# Altium PCB N303-3V1.0.pcbdoc (part 3 of 3)
Units mm, origin at the board's own origin, x right, y up, seen from the top; angles counter-clockwise.
Board outline 100 x 100 mm, 2 copper layers (Top Layer, Bottom Layer); 92 components, 15 nets, 360 pads, 304 vias.
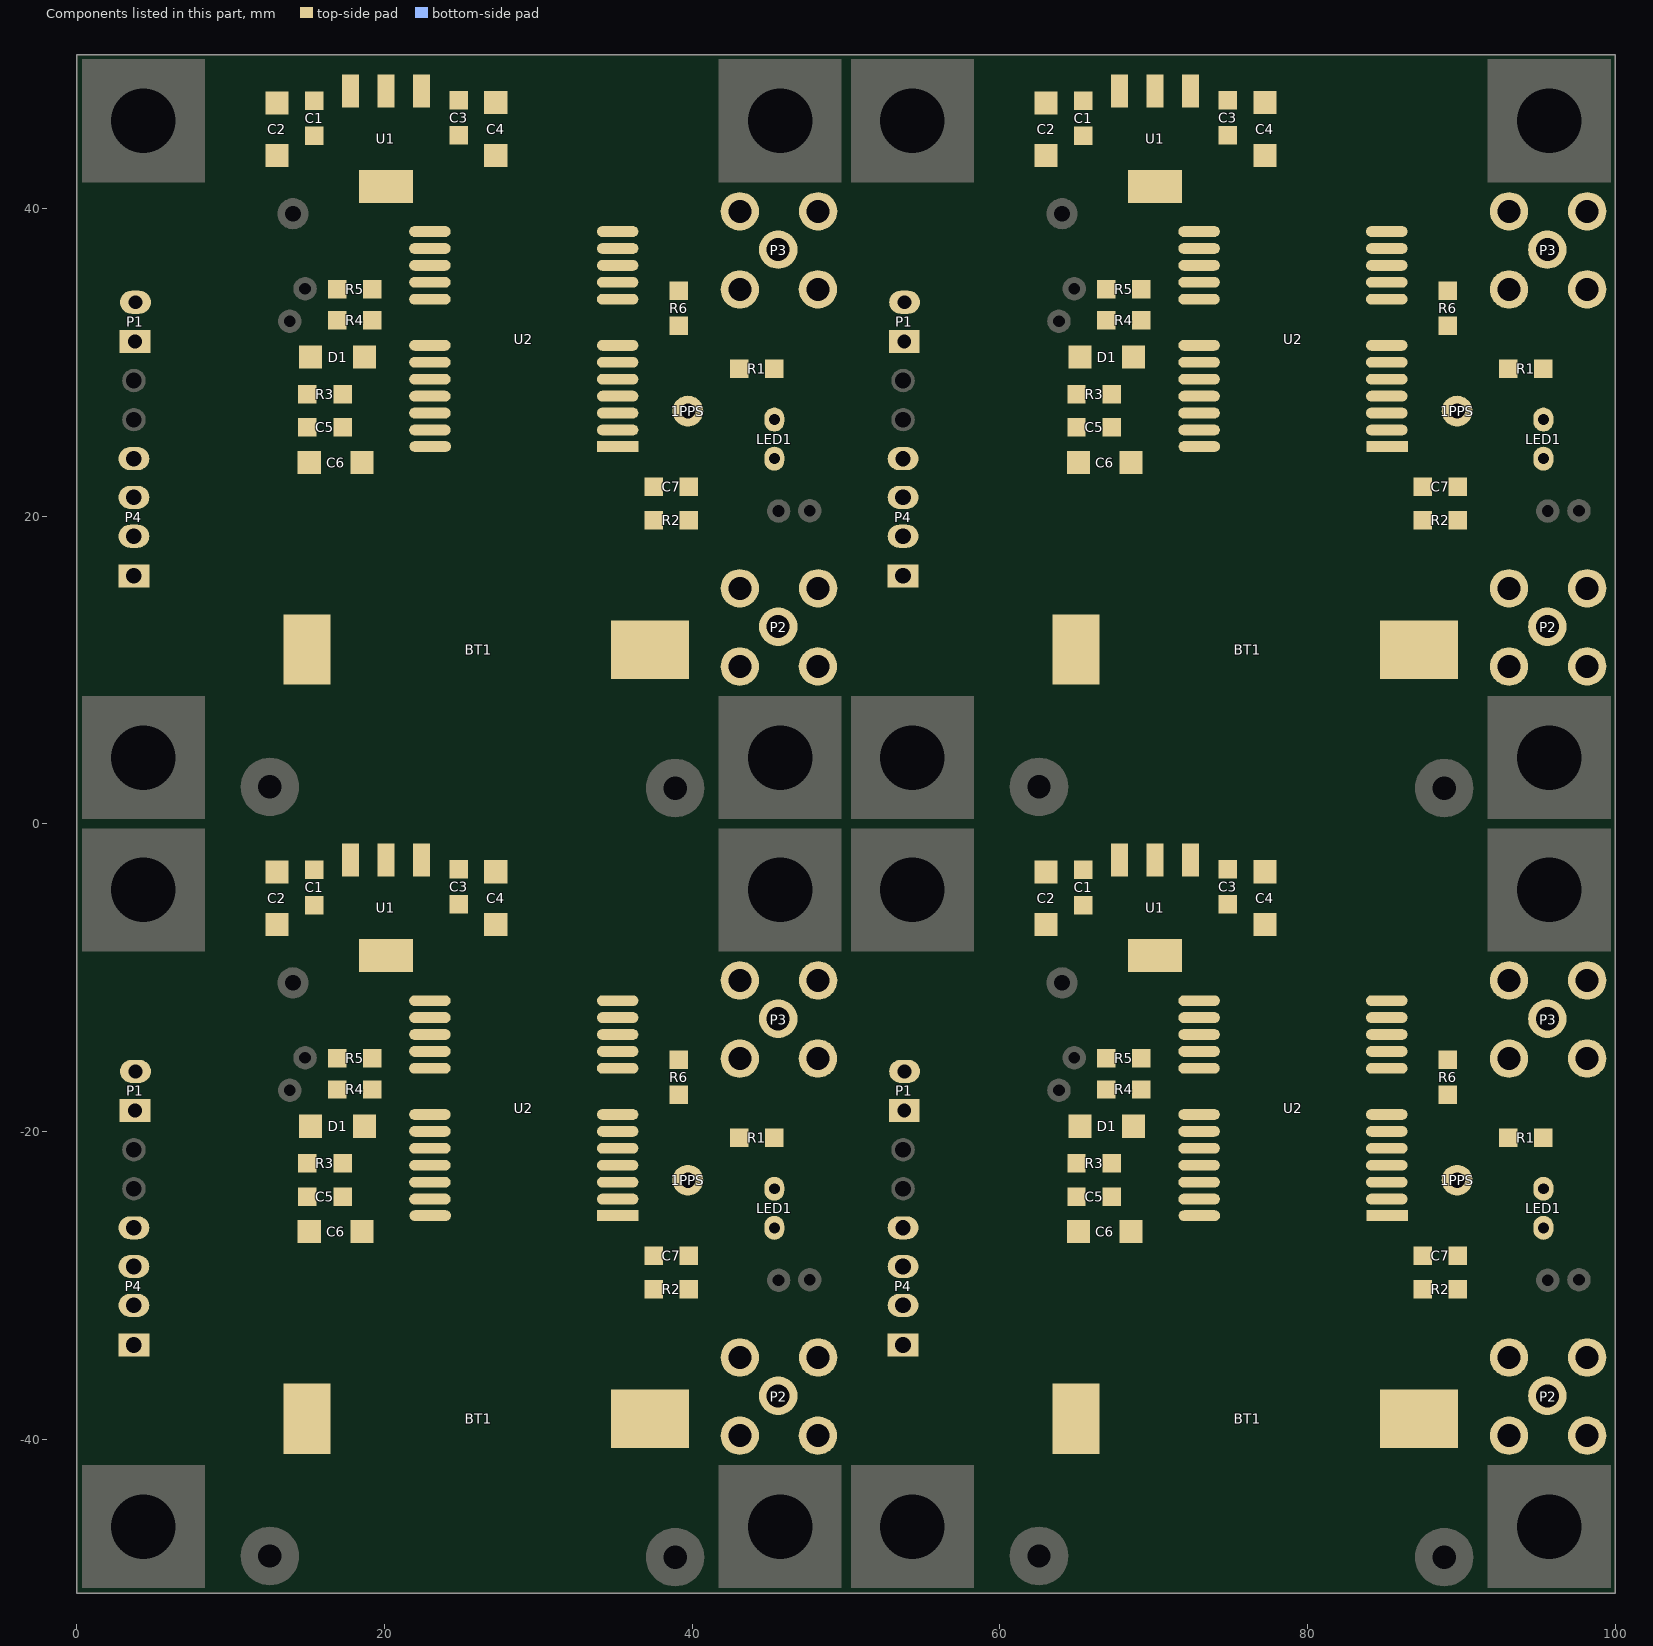
[diagram p3: the components of this part, seen from the top]

## Other copper
Top Layer:
  rectangle: 66.713,-9.69 73.495,-5.906
  rectangle: 62.522,-16.167 65.748,-14.161
  rectangle: 62.802,-18.199 65.773,-16.497
  rectangle: 87.287,-11.722 91.478,-10.452
  rectangle: 94.809,-16.828 96.406,-14.364
  rectangle: 97.371,-13.627 99.352,-11.671
  rectangle: 94.704,-10.833 96.533,-8.75
  rectangle: 75.273,-29.324 82.944,-11.459
  rectangle: 50.66,-35.522 52.108,-9.081
  rectangle: 94.78,-30.848 96.457,-28.41
  rectangle: 66.713,40.31 73.495,44.094
  rectangle: 62.522,33.833 65.748,35.839
  rectangle: 62.802,31.801 65.773,33.503
  rectangle: 87.287,38.278 91.478,39.548
  rectangle: 94.809,33.172 96.406,35.636
  rectangle: 97.371,36.373 99.352,38.329
  rectangle: 94.704,39.167 96.533,41.25
  rectangle: 75.273,20.676 82.944,38.541
  rectangle: 50.66,14.478 52.108,40.919
  rectangle: 94.78,19.152 96.457,21.59
  rectangle: 16.713,-9.69 23.495,-5.906
  rectangle: 12.522,-16.167 15.748,-14.161
  rectangle: 12.802,-18.199 15.773,-16.497
  rectangle: 37.287,-11.722 41.478,-10.452
  rectangle: 44.809,-16.828 46.406,-14.364
  rectangle: 47.371,-13.627 49.352,-11.671
  rectangle: 44.704,-10.833 46.533,-8.75
  rectangle: 25.273,-29.324 32.944,-11.459
  rectangle: 0.66,-35.522 2.108,-9.081
  rectangle: 44.78,-30.848 46.457,-28.41
  rectangle net GPS_1PPS: 44.78,19.152 46.457,21.59
  rectangle net GND: 0.66,14.478 2.108,40.919
  rectangle net GND: 25.273,20.676 32.944,38.541
  rectangle net GND: 44.704,39.167 46.533,41.25
  rectangle net GND: 47.371,36.373 49.352,38.329
  rectangle net GND: 44.809,33.172 46.406,35.636
  rectangle net GND: 37.287,38.278 41.478,39.548
  rectangle net GPS_RX: 12.802,31.801 15.773,33.503
  rectangle net GPS_TX: 12.522,33.833 15.748,35.839
  rectangle net 3.3V: 16.713,40.31 23.495,44.094
  region: 68.161,-22.06 70.066,-22.06 71.29,-23.284 69.385,-23.284
  region: 62.573,-7.811 66.078,-7.811 66.104,-7.785 66.104,-9.843 66.628,-10.367 71.167,-10.367 71.167,-11.484 69.177,-13.475 62.827,-13.475 62.344,-12.992
  region: 74.257,-8.065 78.829,-8.065 78.981,-8.217 78.981,-9.055 77.737,-10.3 73.876,-10.3
  region: 78.981,-0.699 90.284,-0.699 90.386,-0.597 90.869,-1.08 90.869,-9.462 91.579,-10.172 83.351,-10.172 82.766,-10.757 82.766,-11.484 75.527,-11.484 75.527,-10.325 75.502,-10.3 76.721,-9.081 78.956,-9.081
  region: 90.183,-13.684 91.123,-13.684 91.25,-13.811 91.25,-16.548 91.783,-17.082 99.378,-17.082 99.378,-18.91 99.225,-19.063 90.843,-19.063 90.843,-18.936 90.411,-18.504 90.462,-18.453 90.462,-14.11 90.005,-13.653
  region: 96.38,-18.834 96.456,-18.91 99.378,-18.91 99.378,-32.855 99.454,-32.931 99.428,-32.957 98.183,-32.957 96.711,-31.484 96.711,-19.418 96.634,-19.418 96.152,-18.936
  region: 87.313,-24.143 88.405,-24.143 89.065,-24.803 90.538,-24.803 91.224,-24.117 91.935,-24.117 93.993,-26.175 93.993,-26.861 94.221,-27.75 94.221,-32.626 91.15,-33.031 91.097,-33.084 90.894,-32.88 90.894,-32.449 92.596,-30.747 92.596,-25.845 92.113,-25.362 91.119,-25.362 91.119,-25.391 90.538,-25.972 90.538,-27.165 89.751,-27.165 87.313,-24.727
  region: 71.92,-28.766 75.629,-32.474 71.819,-32.474
  region: 71.819,-32.474 90.716,-32.474 90.818,-32.576 90.818,-35.878 84.29,-35.878 84.366,-35.954 84.366,-41.313 90.691,-41.313 90.792,-41.212 91.183,-41.602 91.183,-49.317 62.646,-49.317 62.471,-49.492 62.471,-41.034 63.183,-41.745 67.094,-41.745 67.094,-41.669 67.856,-40.907 67.856,-37.3 71.793,-33.363
  region: 50.584,-35.37 50.61,-35.344 61.938,-35.344 62.649,-36.055 62.649,-49.314 62.573,-49.39 59.804,-49.39 59.246,-48.832 59.246,-41.339 58.712,-40.805 50.597,-40.805
  region: 62.065,-0.597 59.804,-0.597 59.144,-1.257 59.144,-8.573 58.458,-9.258 51.702,-9.258 51.651,-9.208 51.524,-9.335 51.524,-14.872 58.611,-14.872 59.906,-13.576 59.906,-2.756
  region: 55.563,-20.815 56.071,-20.307 57.645,-20.307 58.331,-19.622 58.382,-19.672 58.382,-25.514 57.518,-26.378 55.588,-26.378
  region: 68.161,27.94 70.066,27.94 71.29,26.716 69.385,26.716
  region: 62.573,42.189 66.078,42.189 66.104,42.215 66.104,40.157 66.628,39.633 71.167,39.633 71.167,38.516 69.177,36.525 62.827,36.525 62.344,37.008
  region: 74.257,41.935 78.829,41.935 78.981,41.783 78.981,40.945 77.737,39.7 73.876,39.7
  region: 78.981,49.301 90.284,49.301 90.386,49.403 90.869,48.92 90.869,40.538 91.579,39.828 83.351,39.828 82.766,39.243 82.766,38.516 75.527,38.516 75.527,39.675 75.502,39.7 76.721,40.919 78.956,40.919
  region: 90.183,36.316 91.123,36.316 91.25,36.189 91.25,33.452 91.783,32.918 99.378,32.918 99.378,31.09 99.225,30.937 90.843,30.937 90.843,31.064 90.411,31.496 90.462,31.547 90.462,35.89 90.005,36.347
  region: 96.38,31.166 96.456,31.09 99.378,31.09 99.378,17.145 99.454,17.069 99.428,17.043 98.183,17.043 96.711,18.516 96.711,30.582 96.634,30.582 96.152,31.064
  region: 87.313,25.857 88.405,25.857 89.065,25.197 90.538,25.197 91.224,25.883 91.935,25.883 93.993,23.825 93.993,23.139 94.221,22.25 94.221,17.374 91.15,16.969 91.097,16.916 90.894,17.12 90.894,17.551 92.596,19.253 92.596,24.155 92.113,24.638 91.119,24.638 91.119,24.609 90.538,24.028 90.538,22.835 89.751,22.835 87.313,25.273
  region: 71.92,21.234 75.629,17.526 71.819,17.526
  region: 71.819,17.526 90.716,17.526 90.818,17.424 90.818,14.122 84.29,14.122 84.366,14.046 84.366,8.687 90.691,8.687 90.792,8.788 91.183,8.398 91.183,0.683 62.646,0.683 62.471,0.508 62.471,8.966 63.183,8.255 67.094,8.255 67.094,8.331 67.856,9.093 67.856,12.7 71.793,16.637
  region: 50.584,14.63 50.61,14.656 61.938,14.656 62.649,13.945 62.649,0.686 62.573,0.61 59.804,0.61 59.246,1.168 59.246,8.661 58.712,9.195 50.597,9.195
  region: 62.065,49.403 59.804,49.403 59.144,48.743 59.144,41.427 58.458,40.742 51.702,40.742 51.651,40.792 51.524,40.665 51.524,35.128 58.611,35.128 59.906,36.424 59.906,47.244
  region: 55.563,29.185 56.071,29.693 57.645,29.693 58.331,30.378 58.382,30.328 58.382,24.486 57.518,23.622 55.588,23.622
  region: 18.161,-22.06 20.066,-22.06 21.29,-23.284 19.385,-23.284
  region: 12.573,-7.811 16.078,-7.811 16.104,-7.785 16.104,-9.843 16.628,-10.367 21.167,-10.367 21.167,-11.484 19.177,-13.475 12.827,-13.475 12.344,-12.992
  region: 24.257,-8.065 28.829,-8.065 28.981,-8.217 28.981,-9.055 27.737,-10.3 23.876,-10.3
  region: 28.981,-0.699 40.284,-0.699 40.386,-0.597 40.869,-1.08 40.869,-9.462 41.579,-10.172 33.351,-10.172 32.766,-10.757 32.766,-11.484 25.527,-11.484 25.527,-10.325 25.502,-10.3 26.721,-9.081 28.956,-9.081
  region: 40.183,-13.684 41.123,-13.684 41.25,-13.811 41.25,-16.548 41.783,-17.082 49.378,-17.082 49.378,-18.91 49.225,-19.063 40.843,-19.063 40.843,-18.936 40.411,-18.504 40.462,-18.453 40.462,-14.11 40.005,-13.653
  region: 46.38,-18.834 46.457,-18.91 49.378,-18.91 49.378,-32.855 49.454,-32.931 49.428,-32.957 48.183,-32.957 46.711,-31.484 46.711,-19.418 46.634,-19.418 46.152,-18.936
  region: 37.313,-24.143 38.405,-24.143 39.065,-24.803 40.538,-24.803 41.224,-24.117 41.935,-24.117 43.993,-26.175 43.993,-26.861 44.221,-27.75 44.221,-32.626 41.15,-33.031 41.097,-33.084 40.894,-32.88 40.894,-32.449 42.596,-30.747 42.596,-25.845 42.113,-25.362 41.119,-25.362 41.119,-25.391 40.538,-25.972 40.538,-27.165 39.751,-27.165 37.313,-24.727
  region: 21.92,-28.766 25.629,-32.474 21.819,-32.474
  region: 21.819,-32.474 40.716,-32.474 40.818,-32.576 40.818,-35.878 34.29,-35.878 34.366,-35.954 34.366,-41.313 40.691,-41.313 40.792,-41.212 41.183,-41.602 41.183,-49.317 12.646,-49.317 12.471,-49.492 12.471,-41.034 13.183,-41.745 17.094,-41.745 17.094,-41.669 17.856,-40.907 17.856,-37.3 21.793,-33.363
  region: 0.584,-35.37 0.61,-35.344 11.938,-35.344 12.649,-36.055 12.649,-49.314 12.573,-49.39 9.804,-49.39 9.246,-48.832 9.246,-41.339 8.712,-40.805 0.597,-40.805
  region: 12.065,-0.597 9.804,-0.597 9.144,-1.257 9.144,-8.573 8.458,-9.258 1.702,-9.258 1.651,-9.208 1.524,-9.335 1.524,-14.872 8.611,-14.872 9.906,-13.576 9.906,-2.756
  region: 5.563,-20.815 6.071,-20.307 7.645,-20.307 8.331,-19.622 8.382,-19.672 8.382,-25.514 7.518,-26.378 5.588,-26.378
  region net GND: 5.563,29.185 6.071,29.693 7.645,29.693 8.331,30.378 8.382,30.328 8.382,24.486 7.518,23.622 5.588,23.622
  region net GND: 12.065,49.403 9.804,49.403 9.144,48.743 9.144,41.427 8.458,40.742 1.702,40.742 1.651,40.792 1.524,40.665 1.524,35.128 8.611,35.128 9.906,36.424 9.906,47.244
  region net GND: 0.584,14.63 0.61,14.656 11.938,14.656 12.649,13.945 12.649,0.686 12.573,0.61 9.804,0.61 9.246,1.168 9.246,8.661 8.712,9.195 0.597,9.195
  region net GND: 21.819,17.526 40.716,17.526 40.818,17.424 40.818,14.122 34.29,14.122 34.366,14.046 34.366,8.687 40.691,8.687 40.792,8.788 41.183,8.398 41.183,0.683 12.646,0.683 12.471,0.508 12.471,8.966 13.183,8.255 17.094,8.255 17.094,8.331 17.856,9.093 17.856,12.7 21.793,16.637
  region net GND: 21.92,21.234 25.629,17.526 21.819,17.526
  region net GND: 37.313,25.857 38.405,25.857 39.065,25.197 40.538,25.197 41.224,25.883 41.935,25.883 43.993,23.825 43.993,23.139 44.221,22.25 44.221,17.374 41.15,16.969 41.097,16.916 40.894,17.12 40.894,17.551 42.596,19.253 42.596,24.155 42.113,24.638 41.119,24.638 41.119,24.609 40.538,24.028 40.538,22.835 39.751,22.835 37.313,25.273
  region net GND: 46.38,31.166 46.457,31.09 49.378,31.09 49.378,17.145 49.454,17.069 49.428,17.043 48.183,17.043 46.711,18.516 46.711,30.582 46.634,30.582 46.152,31.064
  region net GND: 40.183,36.316 41.123,36.316 41.25,36.189 41.25,33.452 41.783,32.918 49.378,32.918 49.378,31.09 49.225,30.937 40.843,30.937 40.843,31.064 40.411,31.496 40.462,31.547 40.462,35.89 40.005,36.347
  region net GND: 28.981,49.301 40.284,49.301 40.386,49.403 40.869,48.92 40.869,40.538 41.579,39.828 33.351,39.828 32.766,39.243 32.766,38.516 25.527,38.516 25.527,39.675 25.502,39.7 26.721,40.919 28.956,40.919
  region net GND: 24.257,41.935 28.829,41.935 28.981,41.783 28.981,40.945 27.737,39.7 23.876,39.7
  region net GND: 12.573,42.189 16.078,42.189 16.104,42.215 16.104,40.157 16.628,39.633 21.167,39.633 21.167,38.516 19.177,36.525 12.827,36.525 12.344,37.008
  region net NetBT1_1: 18.161,27.94 20.066,27.94 21.29,26.716 19.385,26.716
Bottom Layer:
  rectangle: 55.994,-32.068 59.169,-9.741
  rectangle: 51.803,-14.745 56.452,-9.817
  rectangle: 94.044,-22.365 97.6,-18.021
  rectangle: 55.994,17.932 59.169,40.259
  rectangle: 51.803,35.255 56.452,40.183
  rectangle: 94.044,27.635 97.6,31.979
  rectangle: 5.994,-32.068 9.169,-9.741
  rectangle: 1.803,-14.745 6.452,-9.817
  rectangle: 44.044,-22.365 47.6,-18.021
  rectangle net GND: 44.044,27.635 47.6,31.979
  rectangle net GND: 1.803,35.255 6.452,40.183
  rectangle net GND: 5.994,17.932 9.169,40.259
  region: 59.83,-0.914 89.789,-0.914 89.853,-0.851 90.411,-1.41 90.538,-1.41 90.538,-8.547 90.411,-8.674 76.441,-8.674 76.441,-8.217 77.28,-7.379 77.28,-5.702 76.314,-4.737 62.446,-4.737 59.474,-7.709
  region: 63.64,-32.195 63.818,-32.017 92.443,-32.017 92.443,-32.22 90.792,-33.871 90.792,-49.086 59.881,-49.086 59.677,-48.882 59.677,-41.44 59.627,-41.44 58.509,-40.323 58.433,-40.399 51.753,-40.399 51.753,-35.649 51.778,-35.674 60.363,-35.674 63.792,-32.245
  region: 64.148,-8.522 90.513,-8.522 90.919,-8.928 90.919,-16.955 91.529,-17.564 91.402,-17.691 66.739,-17.691 66.739,-13.754 66.002,-13.018 63.462,-13.018 63.386,-13.094 63.081,-12.789 63.081,-9.589
  region: 72.225,-29.655 72.225,-31.864 72.022,-32.068 71.971,-32.017 63.792,-32.017 63.792,-20.587 63.589,-20.384 66.434,-17.539 72.403,-17.539 72.479,-17.615 72.149,-17.945 72.149,-22.416 70.574,-20.841 68.593,-20.841 67.958,-21.476 68.059,-21.577 68.059,-26.632 68.821,-27.394 68.821,-29.045 71.946,-29.045 72.352,-29.451
  region: 72.352,-18.758 72.403,-18.707 88.227,-18.707 88.227,-19.469 87.871,-19.825 88.151,-20.104 88.151,-24.549 90.03,-26.429 90.03,-27.572 92.875,-27.572 93.205,-27.902 93.205,-31.814 72.377,-31.814 72.276,-31.712
  region: 59.83,49.086 89.789,49.086 89.853,49.149 90.411,48.59 90.538,48.59 90.538,41.453 90.411,41.326 76.441,41.326 76.441,41.783 77.28,42.621 77.28,44.298 76.314,45.263 62.446,45.263 59.474,42.291
  region: 63.64,17.805 63.818,17.983 92.443,17.983 92.443,17.78 90.792,16.129 90.792,0.914 59.881,0.914 59.677,1.118 59.677,8.56 59.627,8.56 58.509,9.677 58.433,9.601 51.753,9.601 51.753,14.351 51.778,14.326 60.363,14.326 63.792,17.755
  region: 64.148,41.478 90.513,41.478 90.919,41.072 90.919,33.045 91.529,32.436 91.402,32.309 66.739,32.309 66.739,36.246 66.002,36.982 63.462,36.982 63.386,36.906 63.081,37.211 63.081,40.411
  region: 72.225,20.345 72.225,18.136 72.022,17.932 71.971,17.983 63.792,17.983 63.792,29.413 63.589,29.616 66.434,32.461 72.403,32.461 72.479,32.385 72.149,32.055 72.149,27.584 70.574,29.159 68.593,29.159 67.958,28.524 68.059,28.423 68.059,23.368 68.821,22.606 68.821,20.955 71.946,20.955 72.352,20.549
  region: 72.352,31.242 72.403,31.293 88.227,31.293 88.227,30.531 87.871,30.175 88.151,29.896 88.151,25.451 90.03,23.571 90.03,22.428 92.875,22.428 93.205,22.098 93.205,18.186 72.377,18.186 72.276,18.288
  region: 9.83,-0.914 39.789,-0.914 39.853,-0.851 40.411,-1.41 40.538,-1.41 40.538,-8.547 40.411,-8.674 26.441,-8.674 26.441,-8.217 27.28,-7.379 27.28,-5.702 26.314,-4.737 12.446,-4.737 9.474,-7.709
  region: 13.64,-32.195 13.818,-32.017 42.443,-32.017 42.443,-32.22 40.792,-33.871 40.792,-49.086 9.881,-49.086 9.677,-48.882 9.677,-41.44 9.627,-41.44 8.509,-40.323 8.433,-40.399 1.753,-40.399 1.753,-35.649 1.778,-35.674 10.363,-35.674 13.792,-32.245
  region: 14.148,-8.522 40.513,-8.522 40.919,-8.928 40.919,-16.955 41.529,-17.564 41.402,-17.691 16.739,-17.691 16.739,-13.754 16.002,-13.018 13.462,-13.018 13.386,-13.094 13.081,-12.789 13.081,-9.589
  region: 22.225,-29.655 22.225,-31.864 22.022,-32.068 21.971,-32.017 13.792,-32.017 13.792,-20.587 13.589,-20.384 16.434,-17.539 22.403,-17.539 22.479,-17.615 22.149,-17.945 22.149,-22.416 20.574,-20.841 18.593,-20.841 17.958,-21.476 18.059,-21.577 18.059,-26.632 18.821,-27.394 18.821,-29.045 21.946,-29.045 22.352,-29.451
  region: 22.352,-18.758 22.403,-18.707 38.227,-18.707 38.227,-19.469 37.871,-19.825 38.151,-20.104 38.151,-24.549 40.03,-26.429 40.03,-27.572 42.875,-27.572 43.205,-27.902 43.205,-31.814 22.377,-31.814 22.276,-31.712
  region net GND: 21.996,32.385 21.971,32.41 16.307,32.41 16.307,32.283 13.716,29.693 13.716,17.78 21.996,17.78 22.225,18.009 22.225,20.345 19.228,20.345 18.948,20.625 18.948,22.758 17.882,23.825 17.882,28.854 18.415,29.388 18.491,29.312 20.676,29.312 22.403,27.584
  region net GND: 22.352,31.242 22.403,31.293 38.227,31.293 38.227,30.531 37.871,30.175 38.151,29.896 38.151,25.451 40.03,23.571 40.03,22.428 42.875,22.428 43.205,22.098 43.205,18.186 22.377,18.186 22.276,18.288
  region net GND: 14.148,41.478 40.513,41.478 40.919,41.072 40.919,33.045 41.529,32.436 41.402,32.309 16.739,32.309 16.739,36.246 16.002,36.982 13.462,36.982 13.386,36.906 13.081,37.211 13.081,40.411
  region net GND: 13.64,17.805 13.818,17.983 42.443,17.983 42.443,17.78 40.792,16.129 40.792,0.914 9.881,0.914 9.677,1.118 9.677,8.56 9.627,8.56 8.509,9.677 8.433,9.601 1.753,9.601 1.753,14.351 1.778,14.326 10.363,14.326 13.792,17.755
  region net GND: 9.83,49.086 39.789,49.086 39.853,49.149 40.411,48.59 40.538,48.59 40.538,41.453 40.411,41.326 26.441,41.326 26.441,41.783 27.28,42.621 27.28,44.298 26.314,45.263 12.446,45.263 9.474,42.291

## Silkscreen, mask and mechanical layers (free items; w line width, h text height)
Top Overlay:
  rectangle: 66.053,-13.78 67.78,-13.322
  rectangle: 66.053,36.22 67.78,36.678
  rectangle: 16.053,-13.78 17.78,-13.322
  rectangle: 16.053,36.22 17.78,36.678
  region: 65.138,-13.551 65.57,-13.551 66.129,-12.992 66.129,-14.084
  region: 65.551,-13.551 66.084,-13.018 66.129,-13.063 66.129,-14.059 65.621,-13.551
  region: 65.138,36.449 65.57,36.449 66.129,37.008 66.129,35.916
  region: 65.551,36.449 66.084,36.982 66.129,36.937 66.129,35.941 65.621,36.449
  region: 15.138,-13.551 15.57,-13.551 16.129,-12.992 16.129,-14.084
  region: 15.551,-13.551 16.084,-13.018 16.129,-13.063 16.129,-14.059 15.621,-13.551
  region: 15.551,36.449 16.084,36.982 16.129,36.937 16.129,35.941 15.621,36.449
  region: 15.138,36.449 15.57,36.449 16.129,37.008 16.129,35.916
  lines w0.178: 0,0 50,0 ; 7.518,-32.093 13.233,-32.093 ; 7.518,-29.426 13.233,-29.426 ; 7.518,-26.886 13.233,-26.886 ; 7.518,17.907 13.233,17.907 ; 7.518,20.574 13.233,20.574 ; 7.518,23.114 13.233,23.114 ; 7.62,-17.386 12.7,-17.386 ; 7.62,32.614 12.7,32.614 ; 15.354,-13.551 15.817,-13.284 ; 15.354,36.449 15.817,36.716 ; 15.85,-13.272 15.9,-13.322 17.78,-13.322 17.78,-13.551 ; 15.85,36.728 15.9,36.678 17.78,36.678 17.78,36.449 ; 16.053,-13.78 17.78,-13.78 17.78,-13.551 ; 16.053,36.22 17.78,36.22 17.78,36.449 ; 50,-50 50,0 ; 50,50 50,0 ; 57.518,-32.093 63.233,-32.093 ; 57.518,-29.426 63.233,-29.426 ; 57.518,-26.886 63.233,-26.886 ; 57.518,17.907 63.233,17.907 ; 57.518,20.574 63.233,20.574 ; 57.518,23.114 63.233,23.114 ; 57.62,-17.386 62.7,-17.386 ; 57.62,32.614 62.7,32.614 ; 65.354,-13.551 65.817,-13.284 ; 65.354,36.449 65.817,36.716 ; 65.85,-13.272 65.9,-13.322 67.78,-13.322 67.78,-13.551 ; 65.85,36.728 65.9,36.678 67.78,36.678 67.78,36.449 ; 66.053,-13.78 67.78,-13.78 67.78,-13.551 ; 66.053,36.22 67.78,36.22 67.78,36.449 ; 100,0 50,0 ; 15.138,-13.551 17.78,-13.551 ; 15.138,-13.551 16.129,-12.992 16.129,-14.084 15.138,-13.551 ; 15.138,36.449 16.129,35.916 16.129,37.008 15.138,36.449 ; 15.138,36.449 17.78,36.449 ; 65.138,-13.551 67.78,-13.551 ; 65.138,-13.551 66.129,-12.992 66.129,-14.084 65.138,-13.551 ; 65.138,36.449 67.78,36.449 ; 65.138,36.449 66.129,37.008 66.129,35.916 65.138,36.449 ; 7.518,-34.633 13.233,-34.633 13.233,-24.219 7.518,-24.219 7.518,-34.633 ; 7.518,15.367 7.518,25.781 13.233,25.781 13.233,15.367 7.518,15.367 ; 7.62,-21.196 12.7,-21.196 12.7,-13.576 7.62,-13.576 7.62,-21.196 ; 7.62,28.804 7.62,36.424 12.7,36.424 12.7,28.804 7.62,28.804 ; 57.518,-34.633 63.233,-34.633 63.233,-24.219 57.518,-24.219 57.518,-34.633 ; 57.518,15.367 63.233,15.367 63.233,25.781 57.518,25.781 57.518,15.367 ; 57.62,-21.196 62.7,-21.196 62.7,-13.576 57.62,-13.576 57.62,-21.196 ; 57.62,28.804 62.7,28.804 62.7,36.424 57.62,36.424 57.62,28.804
  text "GND" at 12.802,40.818 h1.02
  text "GND" at 62.802,40.818 h1.02
  text "T" at 13.132,34.29 h1.02
  text "T" at 63.132,34.29 h1.02
  text "GND" at 8.255,33.503 h2.03
  text "GND" at 58.255,33.503 h2.03
  text "R" at 14.808,32.233 h1.02
  text "R" at 64.808,32.233 h1.02
  text "ANT" at 43.688,31.496 h2.03
  text "ANT" at 93.688,31.496 h2.03
  text "5.0V" at 8.255,30.582 h2.03
  text "5.0V" at 58.255,30.582 h2.03
  text "GND" at 8.407,23.749 h2.03
  text "GND" at 58.407,23.749 h2.03
  text "G-TX" at 8.026,21.209 h2.03
  text "G-TX" at 58.026,21.209 h2.03
  text "G-RX" at 8.026,18.669 h2.03
  text "G-RX" at 58.026,18.669 h2.03
  text "1PPS" at 43.434,17.399 h2.03
  text "1PPS" at 93.434,17.399 h2.03
  text "3.3V" at 8.407,16.002 h2.03
  text "3.3V" at 58.407,16.002 h2.03
  text "N303-3V1.0" at 0.686,10.82 h2.54
  text "N303-3V1.0" at 50.686,10.82 h2.54
  text "GND" at 11.252,4.521 h1.02
  text "GND" at 37.719,4.521 h1.02
  text "GND" at 61.252,4.521 h1.02
  text "GND" at 87.719,4.521 h1.02
  text "GND" at 12.802,-9.182 h1.02
  text "GND" at 62.802,-9.182 h1.02
  text "T" at 13.132,-15.71 h1.02
  text "T" at 63.132,-15.71 h1.02
  text "GND" at 8.255,-16.497 h2.03
  text "GND" at 58.255,-16.497 h2.03
  text "R" at 14.808,-17.767 h1.02
  text "R" at 64.808,-17.767 h1.02
  text "ANT" at 43.688,-18.504 h2.03
  text "ANT" at 93.688,-18.504 h2.03
  text "5.0V" at 8.255,-19.418 h2.03
  text "5.0V" at 58.255,-19.418 h2.03
  text "GND" at 8.407,-26.251 h2.03
  text "GND" at 58.407,-26.251 h2.03
  text "G-TX" at 8.026,-28.791 h2.03
  text "G-TX" at 58.026,-28.791 h2.03
  text "G-RX" at 8.026,-31.331 h2.03
  text "G-RX" at 58.026,-31.331 h2.03
  text "1PPS" at 43.434,-32.601 h2.03
  text "1PPS" at 93.434,-32.601 h2.03
  text "3.3V" at 8.407,-33.998 h2.03
  text "3.3V" at 58.407,-33.998 h2.03
  text "N303-3V1.0" at 0.686,-39.18 h2.54
  text "N303-3V1.0" at 50.686,-39.18 h2.54
  text "GND" at 11.252,-45.479 h1.02
  text "GND" at 37.719,-45.479 h1.02
  text "GND" at 61.252,-45.479 h1.02
  text "GND" at 87.719,-45.479 h1.02
Top Solder:
  rectangle: 66.713,-9.69 73.495,-5.906
  rectangle: 66.713,40.31 73.495,44.094
  rectangle: 16.713,-9.69 23.495,-5.906
  rectangle: 16.713,40.31 23.495,44.094
Mechanical 1:
  lines w0.178: 0,-25 50,-25 100,-25 ; 0,25 50,25 100,25

## Text inside footprints (layer, text, board x,y; h text height)
BT1: Top Overlay "+" at 63.513,-42.583 h1.52
BT1: Top Overlay "+" at 63.513,7.417 h1.52
BT1: Top Overlay "+" at 13.513,-42.583 h1.52
BT1: Top Overlay "+" at 13.513,7.417 h1.52
LED1: Top Overlay "+" at 94.806,-21.527 h1.02 r270
LED1: Top Overlay "+" at 94.806,28.473 h1.02 r270
LED1: Top Overlay "+" at 44.806,-21.527 h1.02 r270
LED1: Top Overlay "+" at 44.806,28.473 h1.02 r270